# EAGLE board TSL238T-breakout (EAGLE 9.2.1)
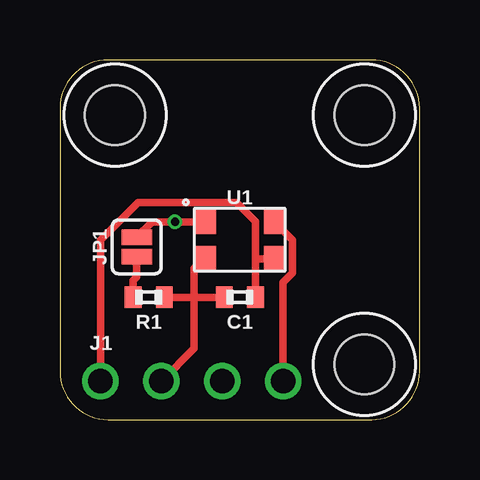
[diagram p0: board, top side]
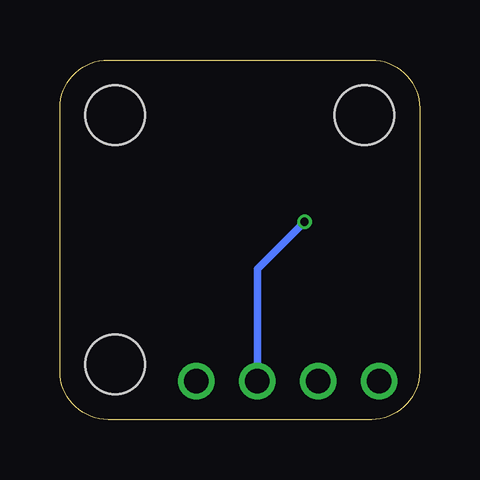
[diagram p1: board, bottom side, seen from below]

Size 15 x 15 mm. Coordinates in mm from the lower left corner, seen from the top.
Outline: 2,0 13,0 arc90 15,2 15,13 arc90 13,15 2,15 arc90 0,13 0,2 arc90 2,0
Copper layers (1*16): Top 0.035559375mm / dielectric 1.6mm / Bottom 0.035559375mm
Design rules "oshpark-2layer": minimum track width 6mil, minimum drill 10mil, track to track 6mil, track to pad 6mil, pad to pad 6mil, via to via 6mil, smd to smd 6mil, copper to edge 15mil, drill to drill 6mil, minimum pad ring 5mil, minimum via ring 5mil, stop-mask expansion 2.5mil, vias tented up to drill 0mil, thermal gap 10mil

## Footprints (pad centres in the part's own frame; a part is rotated, then mirrored left to right if it is on the bottom)
C0402 = smd 0.7 x 0.9: 1 -0.65,0; 2 0.65,0
2_56 = hole 2.5: 0,0
1X04_NOSILK = drill 1.016: 1 -3.81,0; 2 -1.27,0; 3 1.27,0; 4 3.81,0
SMT-JUMPER_2_NC_PASTE_SILK = smd 0.635 x 1.27: 1 -0.406,0; 2 0.406,0
R0402 = smd 0.7 x 0.9: 1 -0.65,0; 2 0.65,0
TSL237T = smd 0.9 x 1: GND -1.45,-0.75; OE -1.45,0.75; OUT 1.45,0.75; VDD 1.45,-0.75

## Placement (x,y rotation side)
C1  0.1uF  [C0402]  7.5,5.1 180 top
H1  [2_56]  2.3,12.7 0 top
H2  [2_56]  12.7,2.3 0 top
H3  [2_56]  12.7,12.7 0 top
J1  CONN_42.54_NOSILK  [1X04_NOSILK]  5.5,1.6 0 top
JP1  JUMPER-SMT_2_NC_PASTE_SILK  [SMT-JUMPER_2_NC_PASTE_SILK]  3.2,7.2 90 top
R1  10k  [R0402]  3.7,5.1 180 top
U1  TSL237T  [TSL237T]  7.5,7.5 0 top

## Library data of the parts
C1 = bschulz_passives; DIGIKEY: 490-4759-1-ND; MF: Murata; MPN: GCM155R71C104KA55D
H1-H3 J1 = bschulz
JP1 = SparkFun-Jumpers
R1 = bschulz_passives; DIGIKEY: 311-10KJRCT-ND; MF: Yageo; MPN: RC0402JR-0710KL; VALUE_PART: 10k
U1 = bschulz; DIGIKEY: TSL237-TCT-ND; MF: AMS; MPN: TSL237T

## Nets
!OE: J1.3 JP1.2 U1.OE
GND: C1.2 J1.2 R1.1 U1.GND
N$2: JP1.1 R1.2
OUT: J1.4 U1.OUT
VDD: C1.1 J1.1 U1.VDD

## Tracks (layer width: path | path; a pad name or v marks a point on that pad's centre or on a via)
!OE  (via drill 0.35)
  Top 0.305: JP1.2 3.84,8.25 v4.8,8.25 U1.OE
  Bottom 0.305: v4.8,8.25 6.77,6.28 J1.3
GND
  Top 0.305: 5.6,5.1 R1.1 | J1.2 5.6,2.97 5.6,5.1 | U1.GND 5.6,6.3 5.6,5.1 | C1.2 5.6,5.1
N$2
  Top 0.305: JP1.1 3.2,5.95 3.05,5.8 R1.2
OUT
  Top 0.305: J1.4 9.31,5.73 9.71,6.12 9.71,7.5 U1.OUT
VDD
  Top 0.305: J1.1 1.69,7.48 3.27,9.05 7.36,9.05 8.15,8.26 8.15,6.7 | 8.15,6.7 C1.1 | U1.VDD 8.9,6.7 8.15,6.7

## Text on the board
bDocu: VDD | GND | OE | OUT